# Altium PCB Altera_Array.PcbDoc
Units mil, origin at the board's own origin, x right, y up, seen from the top; angles counter-clockwise.
Board outline 2539.37 x 3937.01 mil, 2 copper layers (Top Layer, Bottom Layer); 28 components, 84 nets, 307 pads, 16 vias.
Unrouted connection lines stored in the file: 104.
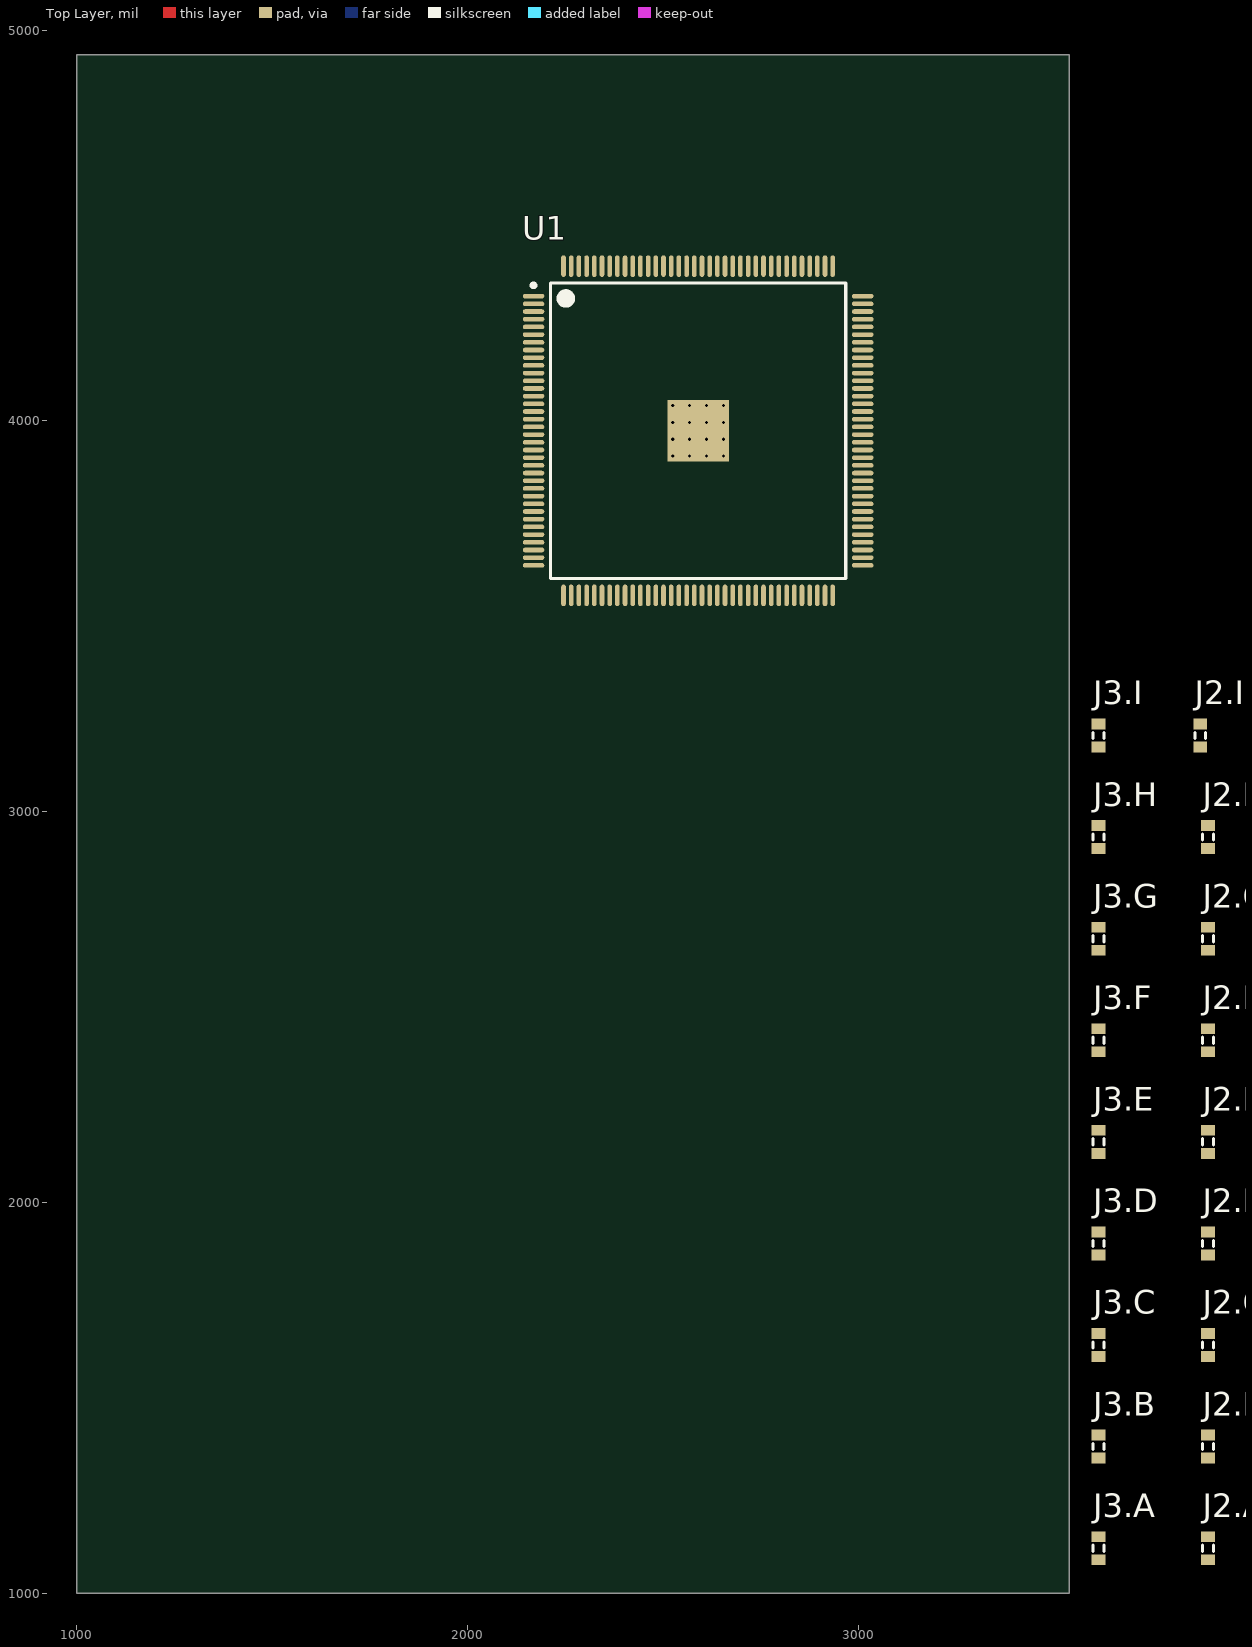
[diagram p0: Top Layer view]
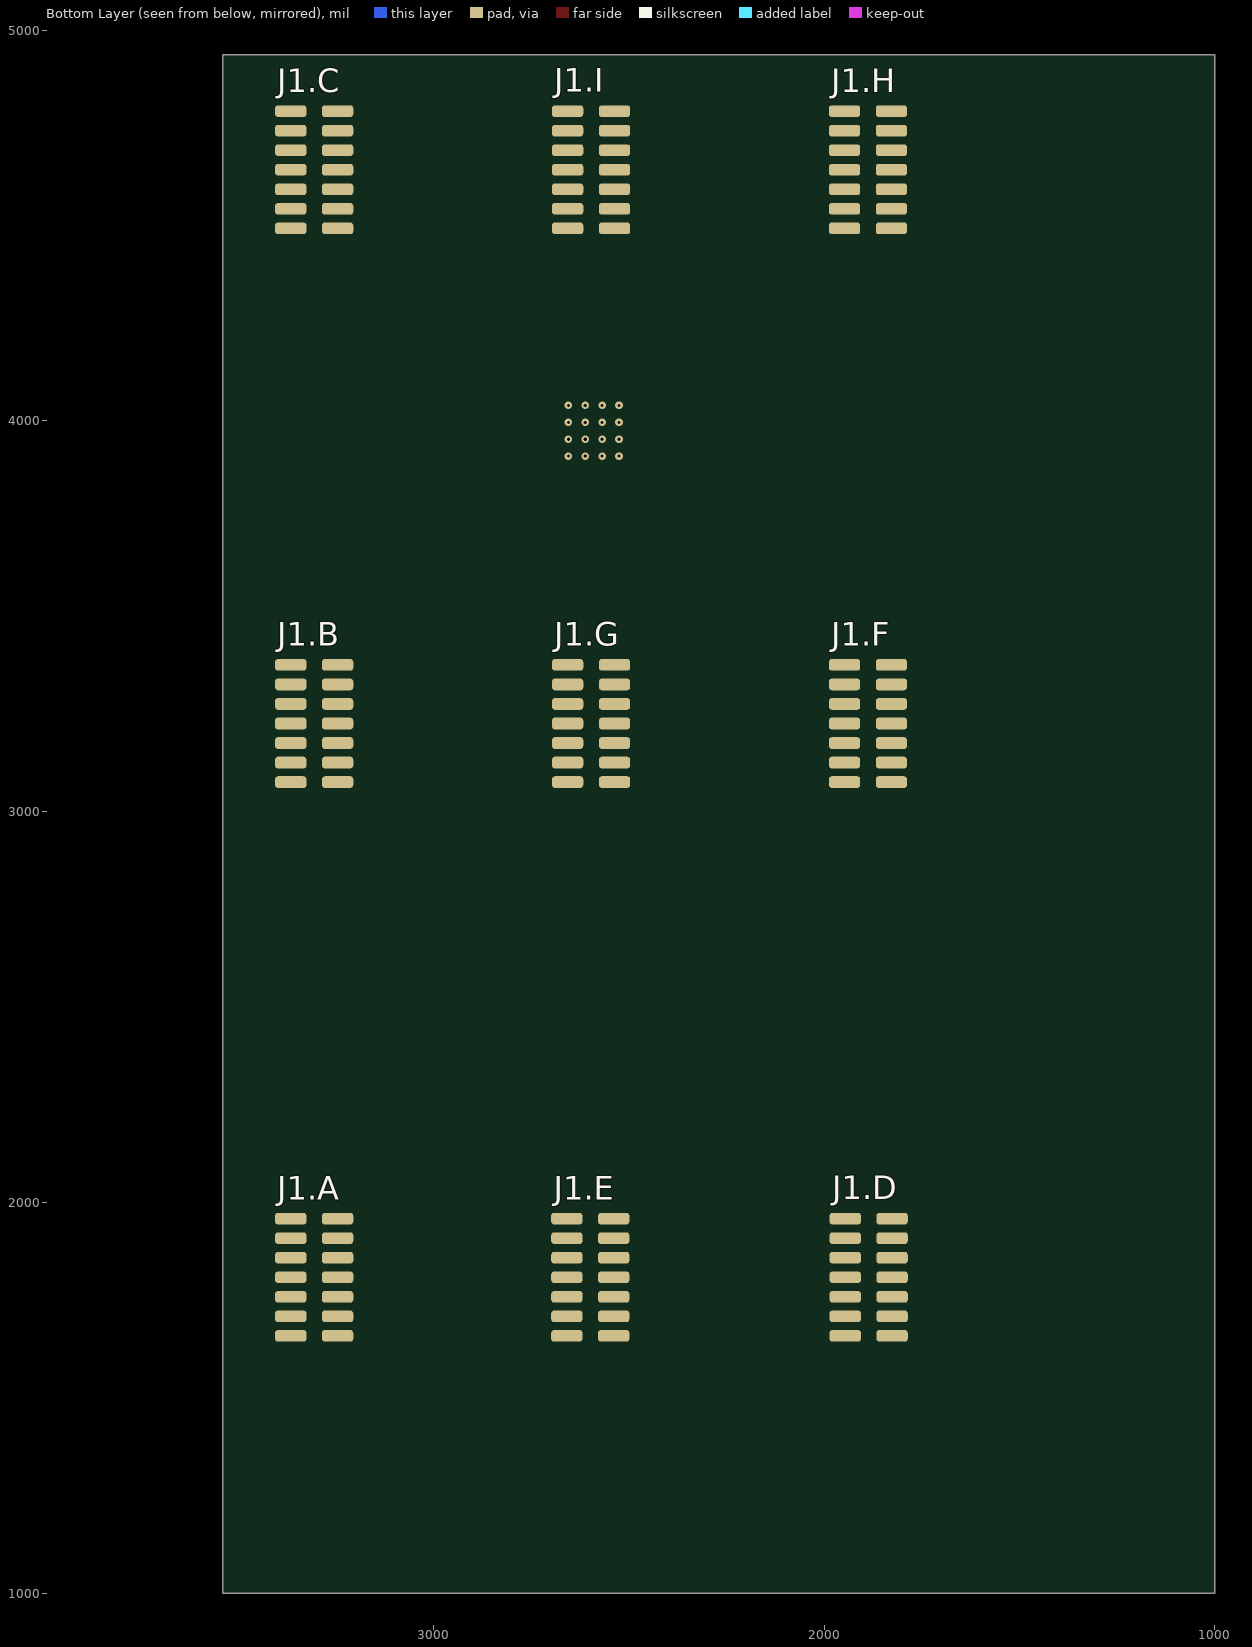
[diagram p1: Bottom Layer view, seen from below]

## Layer stack, top to bottom
Top Solder: solder mask 0.4, Solder Resist, Dk 3.5
Top Layer: signal copper 1.4
Dielectric 1: dielectric 12.6, FR-4, Dk 4.8
Bottom Layer: signal copper 1.4
Bottom Solder: solder mask 0.4, Solder Resist, Dk 3.5

## Board outline
1000,1000 3539.37,1000 3539.37,4937.01 1000,4937.01

## Design rules (kind name [scope] priority, off if disabled: settings)
Clearance [All] p1: gap=5 ignorepadtopadclearanceinfootprint=FALSE except(0: Arc-Hole Track-Hole SMDPad-Hole THPad-Hole Via-Hole Fill-Hole Poly-Hole Region-Hole Text-Hole)
PolygonConnect [All] p1: connectstyle=Relief reliefconductorwidth=10 reliefentries=4 polygonreliefangle="90 Angle" airgapwidth=10
RoutingVias [All] p1: holewidth=28 width=50 viastyle="Through Hole" minholewidth=28 minwidth=50 maxholewidth=28 maxwidth=50
SolderMaskExpansion [All] p1: expansion=4
Width [All] p1: maxlimit=10 minlimit=10 preferedwidth=10
30 further rules are at their usual default settings.

## Classes and differential pairs
component class U_FPGA_IO: U1
channel class ADC_Connector: ADC1 ADC2 ADC3 ADC4 ADC5 ADC6 ADC7 ADC8 ADC9
component class ADC9: J1.I J2.I J3.I
component class ADC8: J1.H J2.H J3.H
component class ADC7: J1.G J2.G J3.G
component class ADC6: J1.F J2.F J3.F
component class ADC5: J1.E J2.E J3.E
component class ADC4: J1.D J2.D J3.D
component class ADC3: J1.C J2.C J3.C
component class ADC2: J1.B J2.B J3.B
component class ADC1: J1.A J2.A J3.A

## Components (designator, comment, footprint, x,y, rotation, side; value= is the part's Value field where it differs from the comment)
J1.A "Header 7X2" CLP-107-02-F-D-A-TR 3305.36,1808.42 r90 bottom (schematic designator J1)
J1.B "Header 7X2" CLP-107-02-F-D-A-TR 3305.36,3225.75 r90 bottom (schematic designator J1)
J1.C "Header 7X2" CLP-107-02-F-D-A-TR 3305.36,4643.07 r90 bottom (schematic designator J1)
J1.D "Header 7X2" CLP-107-02-F-D-A-TR 1886.15,1808.42 r90 bottom (schematic designator J1)
J1.E "Header 7X2" CLP-107-02-F-D-A-TR 2598.75,1808.42 r90 bottom (schematic designator J1)
J1.F "Header 7X2" CLP-107-02-F-D-A-TR 1888.04,3225.75 r90 bottom (schematic designator J1)
J1.G "Header 7X2" CLP-107-02-F-D-A-TR 2596.7,3225.75 r90 bottom (schematic designator J1)
J1.H "Header 7X2" CLP-107-02-F-D-A-TR 1888.04,4643.07 r90 bottom (schematic designator J1)
J1.I "Header 7X2" CLP-107-02-F-D-A-TR 2596.7,4643.07 r90 bottom (schematic designator J1)
J2.A "Res3" J1-0603 3895,1115 r90 top value=0 (schematic designator J2)
J2.B "Res3" J1-0603 3895,1375 r90 top value=0 (schematic designator J2)
J2.C "Res3" J1-0603 3895,1635 r90 top value=0 (schematic designator J2)
J2.D "Res3" J1-0603 3895,1895 r90 top value=0 (schematic designator J2)
J2.E "Res3" J1-0603 3895,2155 r90 top value=0 (schematic designator J2)
J2.F "Res3" J1-0603 3895,2415 r90 top value=0 (schematic designator J2)
J2.G "Res3" J1-0603 3895,2675 r90 top value=0 (schematic designator J2)
J2.H "Res3" J1-0603 3895,2935 r90 top value=0 (schematic designator J2)
J2.I "Res3" J1-0603 3875,3195 r90 top value=0 (schematic designator J2)
J3.A "Res3" J1-0603 3615,1115 r90 top value=0 (schematic designator J3)
J3.B "Res3" J1-0603 3615,1375 r90 top value=0 (schematic designator J3)
J3.C "Res3" J1-0603 3615,1635 r90 top value=0 (schematic designator J3)
J3.D "Res3" J1-0603 3615,1895 r90 top value=0 (schematic designator J3)
J3.E "Res3" J1-0603 3615,2155 r90 top value=0 (schematic designator J3)
J3.F "Res3" J1-0603 3615,2415 r90 top value=0 (schematic designator J3)
J3.G "Res3" J1-0603 3615,2675 r90 top value=0 (schematic designator J3)
J3.H "Res3" J1-0603 3615,2935 r90 top value=0 (schematic designator J3)
J3.I "Res3" J1-0603 3615,3195 r90 top value=0 (schematic designator J3)
U1 "10M50SAE144I7G" TSQFP50P2200X2200X160_HS-145N 2590,3975 r0 top

## Footprints (in the part's own frame and the unit in brackets; to place one, negate y for a bottom-side part, rotate by r counter-clockwise, add the part's x,y. Pads: shape width x height; smd on the part's side, far side on the other; paste and mask are expansions set on the pad)
CLP-107-02-F-D-A-TR [mil]
  rrect50% 30x80 smd: 1(150,60) 2(150,-60) 3(100,60) 4(100,-60) 5(50,60) 6(50,-60) 7(0,60) 8(0,-60) 9(-50,60) 10(-50,-60) 11(-100,60) 12(-100,-60) 13(-150,60) 14(-150,-60)
  body extent -183,-85 184,85, height 90
J1-0603 [mm] "Chip Resistor, Body 1.6x0.8mm, IPC High Density"
  rect 0.7x0.9 smd: 1(-0.75,0) 2(0.75,0)
  silkscreen extent -0.2,-0.35 0.2,0.35, body extent -0.85,-0.48 0.85,0.48, height 0.9
TSQFP50P2200X2200X160_HS-145N [mm] "TSQFP, 144-Leads, Body 20.00x20.00mm, Pitch 0.50mm, Thermal Pad 4.00x4.00mm, IPC Medium Density"
  oval 1.4x0.3 smd: 1(-10.7,8.75) 2(-10.7,8.25) 3(-10.7,7.75) 4(-10.7,7.25) 5(-10.7,6.75) 6(-10.7,6.25) 7(-10.7,5.75) 8(-10.7,5.25) 9(-10.7,4.75) 10(-10.7,4.25) 11(-10.7,3.75) 12(-10.7,3.25) 13(-10.7,2.75) 14(-10.7,2.25) 15(-10.7,1.75) 16(-10.7,1.25) 17(-10.7,0.75) 18(-10.7,0.25) 19(-10.7,-0.25) 20(-10.7,-0.75) 21(-10.7,-1.25) 22(-10.7,-1.75) 23(-10.7,-2.25) 24(-10.7,-2.75) 25(-10.7,-3.25) 26(-10.7,-3.75) 27(-10.7,-4.25) 28(-10.7,-4.75) 29(-10.7,-5.25) 30(-10.7,-5.75) 31(-10.7,-6.25) 32(-10.7,-6.75) 33(-10.7,-7.25) 34(-10.7,-7.75) 35(-10.7,-8.25) 36(-10.7,-8.75) 73(10.7,-8.75) 74(10.7,-8.25) 75(10.7,-7.75) 76(10.7,-7.25) 77(10.7,-6.75) 78(10.7,-6.25) 79(10.7,-5.75) 80(10.7,-5.25) 81(10.7,-4.75) 82(10.7,-4.25) 83(10.7,-3.75) 84(10.7,-3.25) 85(10.7,-2.75) 86(10.7,-2.25) 87(10.7,-1.75) 88(10.7,-1.25) 89(10.7,-0.75) 90(10.7,-0.25) 91(10.7,0.25) 92(10.7,0.75) 93(10.7,1.25) 94(10.7,1.75) 95(10.7,2.25) 96(10.7,2.75) 97(10.7,3.25) 98(10.7,3.75) 99(10.7,4.25) 100(10.7,4.75) 101(10.7,5.25) 102(10.7,5.75) 103(10.7,6.25) 104(10.7,6.75) 105(10.7,7.25) 106(10.7,7.75) 107(10.7,8.25) 108(10.7,8.75)
  oval 0.3x1.4 smd: 37(-8.75,-10.7) 38(-8.25,-10.7) 39(-7.75,-10.7) 40(-7.25,-10.7) 41(-6.75,-10.7) 42(-6.25,-10.7) 43(-5.75,-10.7) 44(-5.25,-10.7) 45(-4.75,-10.7) 46(-4.25,-10.7) 47(-3.75,-10.7) 48(-3.25,-10.7) 49(-2.75,-10.7) 50(-2.25,-10.7) 51(-1.75,-10.7) 52(-1.25,-10.7) 53(-0.75,-10.7) 54(-0.25,-10.7) 55(0.25,-10.7) 56(0.75,-10.7) 57(1.25,-10.7) 58(1.75,-10.7) 59(2.25,-10.7) 60(2.75,-10.7) 61(3.25,-10.7) 62(3.75,-10.7) 63(4.25,-10.7) 64(4.75,-10.7) 65(5.25,-10.7) 66(5.75,-10.7) 67(6.25,-10.7) 68(6.75,-10.7) 69(7.25,-10.7) 70(7.75,-10.7) 71(8.25,-10.7) 72(8.75,-10.7) 109(8.75,10.7) 110(8.25,10.7) 111(7.75,10.7) 112(7.25,10.7) 113(6.75,10.7) 114(6.25,10.7) 115(5.75,10.7) 116(5.25,10.7) 117(4.75,10.7) 118(4.25,10.7) 119(3.75,10.7) 120(3.25,10.7) 121(2.75,10.7) 122(2.25,10.7) 123(1.75,10.7) 124(1.25,10.7) 125(0.75,10.7) 126(0.25,10.7) 127(-0.25,10.7) 128(-0.75,10.7) 129(-1.25,10.7) 130(-1.75,10.7) 131(-2.25,10.7) 132(-2.75,10.7) 133(-3.25,10.7) 134(-3.75,10.7) 135(-4.25,10.7) 136(-4.75,10.7) 137(-5.25,10.7) 138(-5.75,10.7) 139(-6.25,10.7) 140(-6.75,10.7) 141(-7.25,10.7) 142(-7.75,10.7) 143(-8.25,10.7) 144(-8.75,10.7)
  rect 4x4 smd: 145(0,0)
  silkscreen extent -10.82,-9.6 9.6,9.6, body extent -10,-10 10,10, height 1.6

## Part data
J1.A J1.B J1.C J1.D J1.E J1.F J1.G J1.H J1.I: "Header, 7-Pin, Dual row", LatestRevisionDate=17-Jul-2002, LatestRevisionNote="Re-released for DXP Platform.", Publisher="Altium Limited"
J2.A J2.B J2.C J2.D J2.E J2.F J2.G J2.H J2.I J3.A J3.B J3.C J3.D J3.E J3.F J3.G J3.H J3.I: "Resistor", LatestRevisionDate=29-May-2009, LatestRevisionNote="IPC-7351 Footprint Added.", PackageDescription="Chip Resistor", PackageReference=J1-0603, Published=8-Jun-2000, Publisher="Altium Limited"
U1: "IC FPGA 101 I/O 144EQFP"

## Via types
v1: diameter 19.68, hole 7.87, Top Layer to Bottom Layer, 16 vias

## Nets (pads, with @x,y where several pads share a name; then routed paths per layer and width w, separated by ;. In a path a pad name is that pad's centre, name@x,y a point inside that pad or via, vN(x,y) a via of type N, cw(c..) or ccw(c..) an arc to the next point about the centre after c; other vN are vias at no path point)
C\S\.A: J1.A.8 U1.85
C\S\.B: J1.B.8 U1.93
C\S\.C: J1.C.8 U1.105
C\S\.D: J1.D.8 U1.53
C\S\.E: J1.E.8 U1.69
C\S\.F: J1.F.8 U1.42
C\S\.G: J1.G.8 U1.62
C\S\.H: J1.H.8 U1.140
C\S\.I: J1.I.8 U1.118
CONVRUN.A: J1.A.7
CONVRUN.B: J1.B.7
CONVRUN.C: J1.C.7
CONVRUN.D: J1.D.7
CONVRUN.E: J1.E.7
CONVRUN.F: J1.F.7
CONVRUN.G: J1.G.7
CONVRUN.H: J1.H.7
CONVRUN.I: J1.I.7
E\O\C\.A: J1.A.4 U1.87
E\O\C\.B: J1.B.4
E\O\C\.C: J1.C.4 U1.106
E\O\C\.D: J1.D.4 U1.55
E\O\C\.E: J1.E.4 U1.70
E\O\C\.F: J1.F.4 U1.43
E\O\C\.G: J1.G.4 U1.63
E\O\C\.H: J1.H.4 U1.141
E\O\C\.I: J1.I.4 U1.119
GND: J1.A.9 J1.A.10 J1.B.9 J1.B.10 J1.C.9 J1.C.10 J1.D.9 J1.D.10 J1.E.9 J1.E.10 J1.F.9 J1.F.10 J1.G.9 J1.G.10 J1.H.9 J1.H.10 J1.I.9 J1.I.10 J3.A.2 J3.B.2 J3.C.2 J3.D.2 J3.E.2 J3.F.2 J3.G.2 J3.H.2 J3.I.2
MISO.A: J1.A.5 U1.83
MISO.B: J1.B.5 U1.89
MISO.C: J1.C.5 U1.101
MISO.D: J1.D.5 U1.49
MISO.E: J1.E.5 U1.64
MISO.F: J1.F.5 U1.39
MISO.G: J1.G.5 U1.58
MISO.H: J1.H.5 U1.131
MISO.I: J1.I.5 U1.110
MOSI.A: J1.A.6 U1.84
MOSI.B: J1.B.6 U1.90
MOSI.C: J1.C.6 U1.100
MOSI.D: J1.D.6 U1.51
MOSI.E: J1.E.6 U1.65
MOSI.F: J1.F.6 U1.40
MOSI.G: J1.G.6 U1.60
MOSI.H: J1.H.6 U1.132
MOSI.I: J1.I.6 U1.111
NetJ1.A_2: J1.A.2 J2.A.1 J3.A.1
NetJ1.B_2: J1.B.2 J2.B.1 J3.B.1
NetJ1.C_2: J1.C.2 J2.C.1 J3.C.1
NetJ1.D_2: J1.D.2 J2.D.1 J3.D.1
NetJ1.E_2: J1.E.2 J2.E.1 J3.E.1
NetJ1.F_2: J1.F.2 J2.F.1 J3.F.1
NetJ1.G_2: J1.G.2 J2.G.1 J3.G.1
NetJ1.H_2: J1.H.2 J2.H.1 J3.H.1
NetJ1.I_2: J1.I.2 J2.I.1 J3.I.1
OSCIN.A: J1.A.1
OSCIN.B: J1.B.1
OSCIN.C: J1.C.1
OSCIN.D: J1.D.1
OSCIN.E: J1.E.1
OSCIN.F: J1.F.1
OSCIN.G: J1.G.1
OSCIN.H: J1.H.1
OSCIN.I: J1.I.1
SCLK.A: J1.A.3 U1.86
SCLK.B: J1.B.3 U1.91
SCLK.C: J1.C.3 U1.102
SCLK.D: J1.D.3 U1.52
SCLK.E: J1.E.3 U1.66
SCLK.F: J1.F.3 U1.41
SCLK.G: J1.G.3 U1.61
SCLK.H: J1.H.3 U1.133
SCLK.I: J1.I.3 U1.117
SHDN.A: J2.A.2
SHDN.B: J2.B.2
SHDN.C: J2.C.2
SHDN.D: J2.D.2
SHDN.E: J2.E.2
SHDN.F: J2.F.2
SHDN.G: J2.G.2
SHDN.H: J2.H.2
SHDN.I: J2.I.2
VDD_+7V: J1.A.13 J1.B.13 J1.C.13 J1.D.13 J1.E.13 J1.F.13 J1.G.13 J1.H.13 J1.I.13
VDD_-7V: J1.A.14 J1.B.14 J1.C.14 J1.D.14 J1.E.14 J1.F.14 J1.G.14 J1.H.14 J1.I.14
pads on no net: J1.A.11 J1.A.12 J1.B.11 J1.B.12 J1.C.11 J1.C.12 J1.D.11 J1.D.12 J1.E.11 J1.E.12 J1.F.11 J1.F.12 J1.G.11 J1.G.12 J1.H.11 J1.H.12 J1.I.11 J1.I.12 U1.1 U1.2 U1.3 U1.4 U1.5 U1.6 U1.7 U1.8 U1.9 U1.10 U1.11 U1.12 U1.13 U1.14 U1.15 U1.16 U1.17 U1.18 U1.19 U1.20 U1.21 U1.22 U1.23 U1.24 U1.25 U1.26 U1.27 U1.28 U1.29 U1.30 U1.31 U1.32 U1.33 U1.34 U1.35 U1.36 U1.37 U1.38 U1.44 U1.45 U1.46 U1.47 U1.48 U1.50 U1.54 U1.56 U1.57 U1.59 U1.67 U1.68 U1.71 U1.72 U1.73 U1.74 U1.75 U1.76 U1.77 U1.78 U1.79 U1.80 U1.81 U1.82 U1.88 U1.92 U1.94 U1.95 U1.96 U1.97 U1.98 U1.99 U1.103 U1.104 U1.107 U1.108 U1.109 U1.112 U1.113 U1.114 U1.115 U1.116 U1.120 U1.121 U1.122 U1.123 U1.124 U1.125 U1.126 U1.127 U1.128 U1.129 U1.130 U1.134 U1.135 U1.136 U1.137 U1.138 U1.139 U1.142 U1.143 U1.144 U1.145
copper on no net:
  other v1: 2525.04,3910.04 2568.35,3910.04 2611.65,3910.04 2654.96,3910.04 2525.04,3953.35 2568.35,3953.35 2611.65,3953.35 2654.96,3953.35 2525.04,3996.65 2568.35,3996.65 2611.65,3996.65 2654.96,3996.65 2525.04,4039.96 2568.35,4039.96 2611.65,4039.96 2654.96,4039.96

## Silkscreen, mask and mechanical layers (free items; w line width, h text height)
Board Outline:
  lines w0.39: 1000,1000 1000,4937.01 3539.37,4937.01